# Altium PCB PCB1.PcbDoc
Units mil, origin at the board's own origin, x right, y up, seen from the top; angles counter-clockwise.
Board outline 4311 x 2991 mil, 2 copper layers (Top Layer, Bottom Layer); 115 components, 73 nets, 367 pads, 504 vias.
Unrouted connection lines stored in the file: 1.
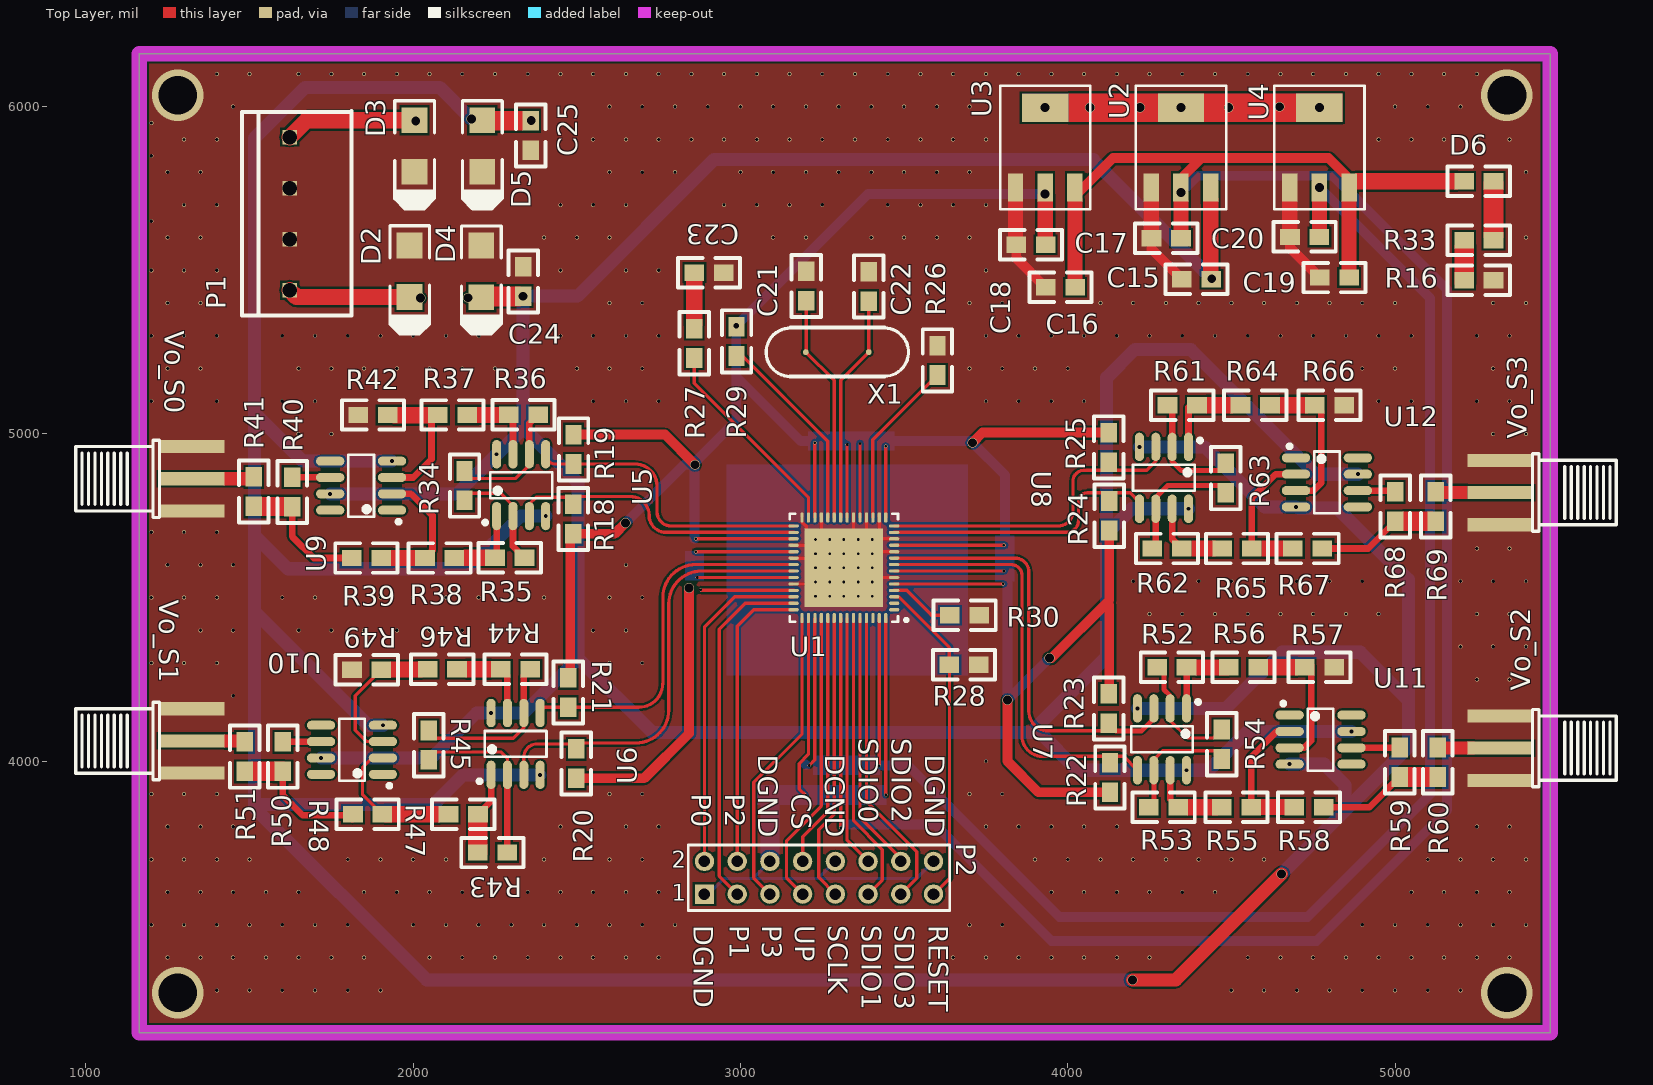
[diagram p0: Top Layer view]
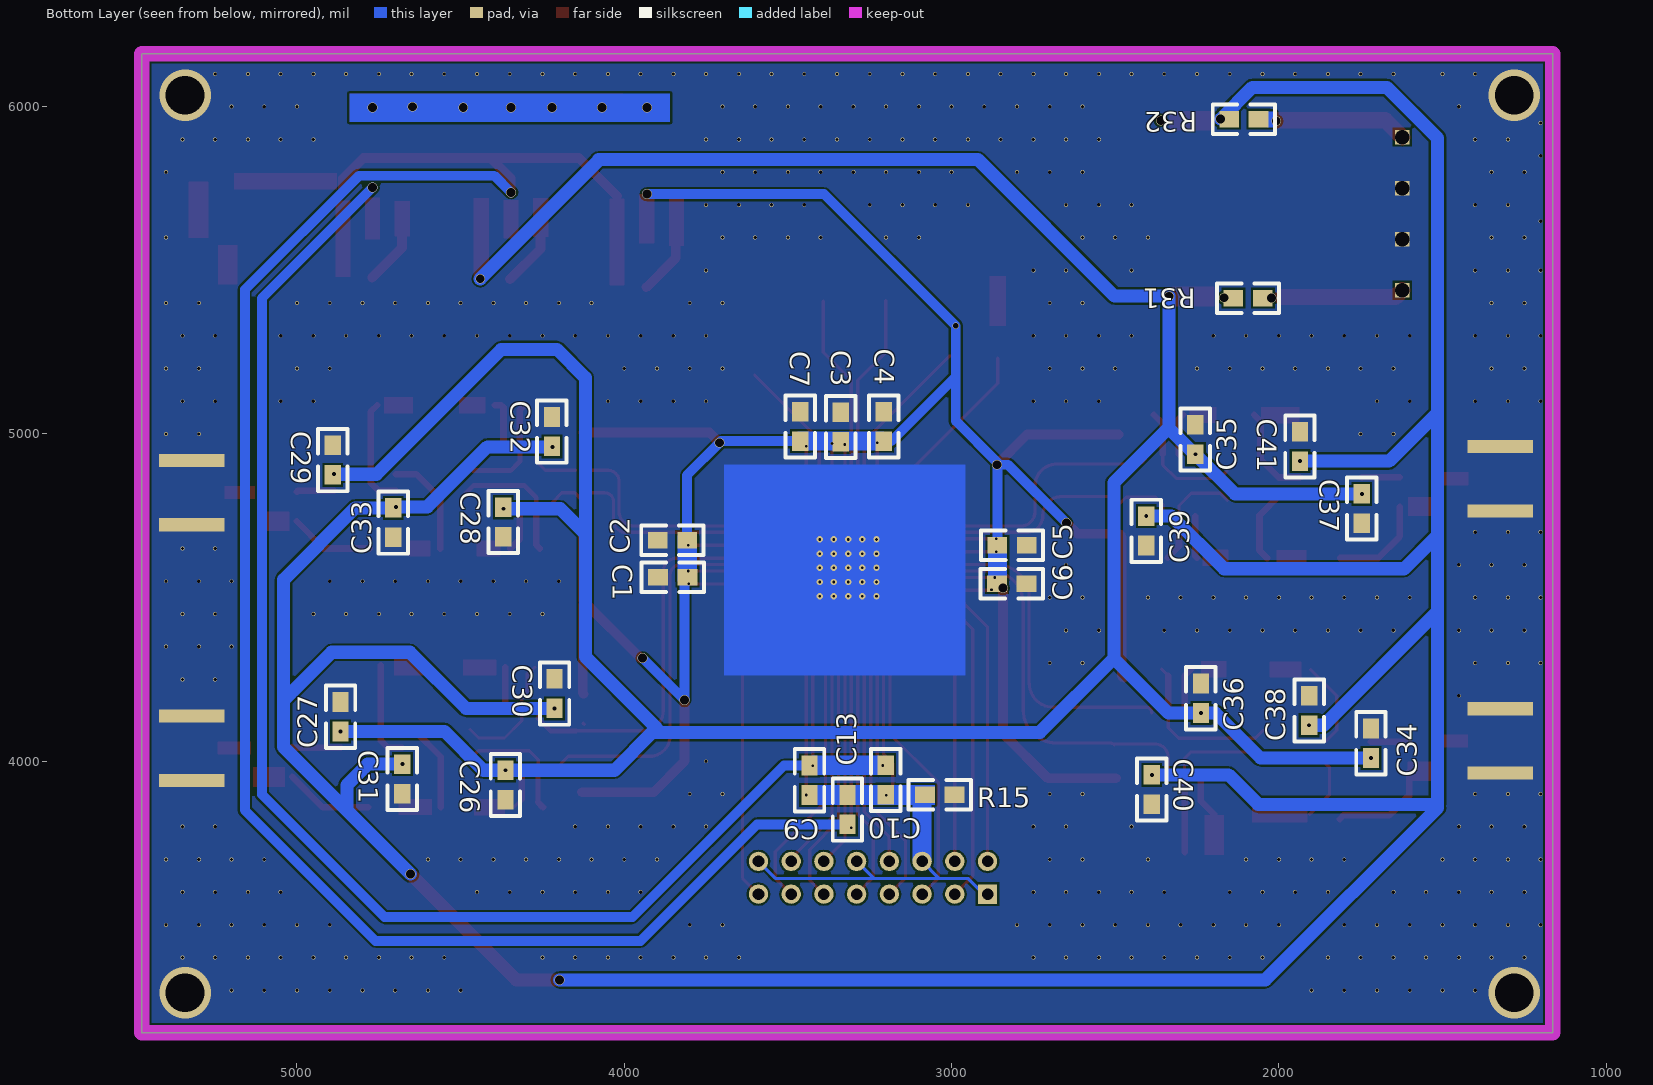
[diagram p1: Bottom Layer view, seen from below]

## Layer stack, top to bottom
Top Solder: solder mask 0.4, Solder Resist, Dk 3.5
Top Layer: signal copper 1.4
Dielectric 1: dielectric 12.6, FR-4, Dk 4.8
Bottom Layer: signal copper 1.4
Bottom Solder: solder mask 0.4, Solder Resist, Dk 3.5

## Board outline
1163,3171 5474,3171 5474,6162 1163,6162

## Design rules (kind name [scope] priority, off if disabled: settings)
Clearance [All] p1: gap=6
PlaneConnect [All] p1: planeconnectstyle=Direct reliefexpansion=20 reliefentries=4 reliefconductorwidth=10 reliefairgap=10
PolygonConnect [All] p1: connectstyle=Direct reliefconductorwidth=10 reliefentries=4 polygonreliefangle="90 Angle" airgapwidth=10
RoutingVias [All] p1: holewidth=28 width=50 viastyle="Through Hole" minholewidth=28 minwidth=50 maxholewidth=28 maxwidth=50
SolderMaskExpansion [All] p1: expansion=4
Width [All] p1: maxlimit=50 minlimit=8 preferedwidth=10
29 further rules are at their usual default settings.

## Components (designator, comment, footprint, x,y, rotation, side; value= is the part's Value field where it differs from the comment)
C1 "0.1uf" 0805 3897,4562 r180 bottom
C2 "0.1uf" 0805 3898,4675 r180 bottom
C3 "0.1uf" 0805 3339,5066 r270 bottom
C4 "0.1uf" 0805 3207,5068 r270 bottom
C5 "0.1uf" 0805 2770,4660 r0 bottom
C6 "0.1uf" 0805 2771,4542 r0 bottom
C7 "0.1uf" 0805 3462,5068 r270 bottom
C9 "0.1uf" 0805 3434,3897 r90 bottom
C10 "0.1uf" 0805 3201,3898 r90 bottom
C13 "0.1uf" 0805 3318,3897 r270 bottom
C15 "0.1uf" 0805 4348.72,5472.72 r0 top
C16 "0.1uf" 0805 3932.59,5448.1 r0 top
C17 "0.1uf" 0805 4256,5598 r0 top
C18 "0.1uf" 0805 3842.59,5578.02 r0 top
C19 "0.1uf" 0805 4770,5478 r0 top
C20 "0.1uf" 0805 4679,5602 r0 top
C21 "39pf" 0805 3201,5497 r270 top
C22 "39pf" 0805 3392,5496 r270 top
C23 "0.1uf" 0805 2859,5493 r0 top
C24 "100uF" 0805 2336,5511 r270 top
C25 "100uF" 0805 2359,5867 r90 top
C26 "0.1uf" 0805 4363,3882.51 r90 bottom
C27 "0.1uf" 0805 4867,4181 r270 bottom
C28 "0.1uf" 0805 4370,4686 r90 bottom
C29 "0.1uf" 0805 4891,4965 r270 bottom
C30 "0.1uf" 0805 4213,4251.49 r270 bottom
C31 "0.1uf" 0805 4678.02,3901 r90 bottom
C32 "0.1uf" 0805 4221,5052 r270 bottom
C33 "0.1uf" 0805 4706,4684 r90 bottom
C34 "0.1uf" 0805 1718.51,4100 r270 bottom
C35 "0.1uf" 0805 2255,5027.98 r270 bottom
C36 "0.1uf" 0805 2238,4237.49 r270 bottom
C37 "0.1uf" 0805 1746.51,4727 r90 bottom
C38 "0.1uf" 0805 1907.49,4200 r270 bottom
C39 "0.1uf" 0805 2405,4659 r90 bottom
C40 "0.1uf" 0805 2388,3868.51 r90 bottom
C41 "0.1uf" 0805 1935.49,5007 r270 bottom
D2 "P6KE6.8A" SMA/DO-214AC 1989,5576 r270 top
D3 "P6KE6.8A" SMA/DO-214AC 2004,5958.48 r270 top
D4 "5.6V" SMA/DO-214AC 2208,5575.48 r270 top
D5 "5.6V" SMA/DO-214AC 2211,5958.48 r270 top
D6 "LED" 0805 5211,5772 r0 top
P1 "VH3.96-4A 电源接入" VH3.96-4P 1477.33,5362.42 r90 top
P2 "Header 8X2" HDR2X8 2890,3594 r0 top
R15 "0" 0805 2991,3898 r0 bottom
R16 "0" 0805 5301,5470 r180 top
R18 "49.9" 0805 2489,4785 r270 top
R19 "49.9" 0805 2490,4908 r90 top
R20 "49.9" 0805 2498,4038 r270 top
R21 "49.9" 0805 2474,4165 r90 top
R22 "49.9" 0805 4129,3995 r270 top
R23 "49.9" 0805 4125,4116 r90 top
R24 "49.9" 0805 4127,4795 r270 top
R25 "49.9" 0805 4125,4914 r90 top
R26 "2K" 0805 3602,5180 r90 top
R27 "680" 0805 2859,5232 r90 top
R28 "1K" 0805 3728,4295 r180 top
R29 "1K" 0805 2988,5328 r270 top
R30 "1K" 0805 3730,4446 r180 top
R31 "600" 0805 2049,5415 r0 bottom
R32 "600" 0805 2062,5962 r0 bottom
R33 "1K" 0805 5301,5592 r180 top
R34 "200R" 0805 2157,4887 r270 top
R35 "100R" 0805 2250,4622 r0 top
R36 "100R" 0805 2382,5059 r180 top
R37 "330R" 0805 2165,5058 r180 top
R38 "330R" 0805 2126,4621 r180 top
R39 "680R" 0805 1902,4621 r180 top
R40 "10R" 0805 1630,4868 r270 top
R41 "49R9" 0805 1513,4779 r90 top
R42 "680R" 0805 1922,5058 r180 top
R43 "100R" 0805 2287,3721 r180 top
R44 "100R" 0805 2268,4281 r0 top
R45 "200R" 0805 2048,4094 r270 top
R46 "330R" 0805 2044,4281 r0 top
R47 "330R" 0805 2108,3838 r0 top
R48 "680R" 0805 1816,3838 r0 top
R49 "680R" 0805 1813,4280 r0 top
R50 "10R" 0805 1602,3969 r90 top
R51 "49R9" 0805 1485,4059 r270 top
R52 "100R" 0805 4273,4287 r0 top
R53 "100R" 0805 4338,3859 r180 top
R54 "200R" 0805 4471,4007 r90 top
R55 "330R" 0805 4561,3859 r180 top
R56 "330R" 0805 4582,4287 r180 top
R57 "680R" 0805 4814,4287 r180 top
R58 "680R" 0805 4782,3859 r180 top
R59 "10R" 0805 5014,3952 r90 top
R60 "49R9" 0805 5131,4042 r270 top
R61 "100R" 0805 4305,5088 r0 top
R62 "100R" 0805 4348,4650 r180 top
R63 "200R" 0805 4483,4820 r90 top
R64 "200R" 0805 4618,5088 r180 top
R65 "200R" 0805 4562,4650 r180 top
R66 "680R" 0805 4845,5088 r180 top
R67 "680R" 0805 4778,4650 r180 top
R68 "10R" 0805 5001,4733 r90 top
R69 "49R9" 0805 5125,4823 r270 top
U1 "ADI-AD9959-CP-56-1" ADI-CP-56-1_L 3316,4591 r180 top
U2 "AMS1117-3.3V" SOT223 4255.45,5752.9 r0 top
U3 "AMS1117-1.8V" SOT223 3840.45,5752.9 r0 top
U4 "AMS1117-1.8V" SOT223 4678.45,5752.9 r0 top
U5 "AD8008" LC-SOIC-8_150mil 2330,4843.49 r0 top
U6 "AD8008" LC-SOIC-8_150mil 2313,4053 r0 top
U7 "AD8008" LC-SOIC-8_150mil 4288,4067 r180 top
U8 "AD8008" LC-SOIC-8_150mil 4294,4866 r180 top
U9 "THS3001" LC-SOIC-8_150mil 1841,4842 r90 top
U10 "THS3001" LC-SOIC-8_150mil 1813,4035 r90 top
U11 "THS3001" LC-SOIC-8_150mil 4772.51,4066 r270 top
U12 "THS3001" LC-SOIC-8_150mil 4792,4852 r270 top
Vo_S0 "差分输出" SMA-LYING 1264,4859.06 r0 top
Vo_S1 "差分输出" SMA-LYING 1264,4058 r0 top
Vo_S2 "差分输出" SMA-LYING 5381,4044 r180 top
Vo_S3 "差分输出" SMA-LYING 5381,4825 r180 top
X1 "XTAL" "XAL HC-49S" 3392,5250 r180 top

## Footprints (in the part's own frame and the unit in brackets; to place one, negate y for a bottom-side part, rotate by r counter-clockwise, add the part's x,y. Pads: shape width x height; smd on the part's side, far side on the other; paste and mask are expansions set on the pad)
0805 [mil]
  rect 60x50 smd: 1(0,0) 2(90,0)
  silkscreen extent -50,-45 140,45
ADI-CP-56-1_L [mm] "QFN, 56-Leads, Body 8x8mm, Pitch 0.5mm, Thermal Pad 6.1x6.1mm, IPC High Density"
  oval 0.8x0.25 smd: 1(-3.9,3.25) 2(-3.9,2.75) 3(-3.9,2.25) 4(-3.9,1.75) 5(-3.9,1.25) 6(-3.9,0.75) 7(-3.9,0.25) 8(-3.9,-0.25) 9(-3.9,-0.75) 10(-3.9,-1.25) 11(-3.9,-1.75) 12(-3.9,-2.25) 13(-3.9,-2.75) 14(-3.9,-3.25) 29(3.9,-3.25) 30(3.9,-2.75) 31(3.9,-2.25) 32(3.9,-1.75) 33(3.9,-1.25) 34(3.9,-0.75) 35(3.9,-0.25) 36(3.9,0.25) 37(3.9,0.75) 38(3.9,1.25) 39(3.9,1.75) 40(3.9,2.25) 41(3.9,2.75) 42(3.9,3.25)
  oval 0.25x0.8 smd: 15(-3.25,-3.9) 16(-2.75,-3.9) 17(-2.25,-3.9) 18(-1.75,-3.9) 19(-1.25,-3.9) 20(-0.75,-3.9) 21(-0.25,-3.9) 22(0.25,-3.9) 23(0.75,-3.9) 24(1.25,-3.9) 25(1.75,-3.9) 26(2.25,-3.9) 27(2.75,-3.9) 28(3.25,-3.9) 43(3.25,3.9) 44(2.75,3.9) 45(2.25,3.9) 46(1.75,3.9) 47(1.25,3.9) 48(0.75,3.9) 49(0.25,3.9) 50(-0.25,3.9) 51(-0.75,3.9) 52(-1.25,3.9) 53(-1.75,3.9) 54(-2.25,3.9) 55(-2.75,3.9) 56(-3.25,3.9)
  rect 6.1x6.1 smd: 57(0,0)
  silkscreen extent -4.98,-4.2 4.2,4.2, body extent -4.05,-4.05 4.05,4.05, height 1
HDR2X8 [mm] "Connector; Header; 8x2 Position"
  rect 1.5x1.5 hole 0.9: 1(0,0)
  round 1.5 hole 0.9: 2(0,2.54) 3(2.54,0) 4(2.54,2.54) 5(5.08,0) 6(5.08,2.54) 7(7.62,0) 8(7.62,2.54) 9(10.16,0) 10(10.16,2.54) 11(12.7,0) 12(12.7,2.54) 13(15.24,0) 14(15.24,2.54) 15(17.78,0) 16(17.78,2.54)
  silkscreen extent -1.27,-1.27 19.05,3.81
LC-SOIC-8_150mil [mm]
  oval 0.7x2.2 smd: 1(-1.905,-2.4) 2(-0.635,-2.4) 3(0.635,-2.4) 4(1.905,-2.4) 5(1.905,2.4) 6(0.635,2.4) 7(-0.635,2.4) 8(-1.905,2.4)
  silkscreen extent -2.95,-3.05 2.4,1
SMA-LYING [mm]
  rect 5.08x1.016 smd: 0(1.5,0.1) 1(1.5,-2.4) 1(1.5,2.6)
  rect 5.08x1.016 smd far side: 1(1.5,-2.4) 1(1.5,2.6)
  silkscreen extent -7.5,-2.9 -1,3.1
SMA/DO-214AC [mm]
  rect 2x2 smd: 1(0,0) 2(4,0)
  silkscreen extent -1.52,-1.52 6.86,1.55
SOT223 [mm]
  rect 1.2x2.2 smd: 1(0,0) 2(2.3,0) 3(4.6,0)
  rect 3.6x2.2 smd: 4(2.3,6.2)
  silkscreen extent -1.2,-1.7 5.8,7.9
VH3.96-4P [mm]
  rect 1.14x1.14 hole 1.14: 1(1.95,-3.7) 2(5.91,-3.7) 3(9.87,-3.7) 4(13.83,-3.7)
  silkscreen extent 0,-8.5 15.87,0
"XAL HC-49S" [mm]
  round 0.45 smd: 1(4.88,0) 2(0,0)
  silkscreen extent -3.08,-1.9 7.96,1.9

## Part data
C1 C2 C3 C4 C5 C6 C7 C9 C10 C13 C15 C16 C17 C18 C19 C20 C21 C22 C23 C26 C27 C28 C29 C30 C31 C32 C33 C34 C35 C36 C37 C38 C39 C40 C41: library part Cap
C24 C25: library part CAP
D4 D5: library part 肖特基-5.6V
P1: library part VH3.96-4A
P2: "Header, 8-Pin, Dual row"
R15 R16 R18 R19 R20 R21 R22 R23 R24 R25 R26 R27 R28 R29 R30 R31 R32 R33 R34 R35 R36 R37 R38 R39 R40 R41 R42 R43 R44 R45 R46 R47 R48 R49 R50 R51 R52 R53 R54 R55 R56 R57 R58 R59 R60 R61 R62 R63 R64 R65 R66 R67 R68 R69: library part Res
Vo_S0 Vo_S1 Vo_S2 Vo_S3: library part SMA
X1: "Crystal Oscillator"

## Via types
v1: diameter 12, hole 10, Top Layer to Bottom Layer, 417 vias
v2: diameter 30, hole 27, Top Layer to Bottom Layer, 25 vias
v3: diameter 19.68, hole 7.87, Top Layer to Bottom Layer, 25 vias
v4: diameter 10, hole 8, Top Layer to Bottom Layer, 16 vias
v5: diameter 15, hole 12, Top Layer to Bottom Layer, 16 vias
v6: diameter 157.48, hole 118.11, Top Layer to Bottom Layer, 4 vias
v7: diameter 20, hole 17, Top Layer to Bottom Layer, 1 vias

## Nets (pads, with @x,y where several pads share a name; then routed paths per layer and width w, separated by ;. In a path a pad name is that pad's centre, name@x,y a point inside that pad or via, vN(x,y) a via of type N, cw(c..) or ccw(c..) an arc to the next point about the centre after c; other vN are vias at no path point)
1.8VA: C1.2 C2.2 C3.2 C4.2 C5.2 C6.2 C7.2 C18.2 R18.2 R19.2 R20.2 R21.2 R22.2 R23.2 R24.2 R25.2 R29.1 U1.5 U1.7 U1.11 U1.15 U1.19 U1.21 U1.26 U1.31 U1.33 U1.37 U1.39 U3.2 | length 10215
  Top Layer w10: v4(2863,4640.21) U1.33 ; v4(2863.42,4679.58) U1.31 ; v4(2867.47,4561.47) U1.37 ; v4(2877.95,4523.62) 2879.47,4522.1 U1.39 ; U1.26 v4(3227.42,4973.42) ; U1.21 v4(3325.84,4967.84) ; U1.19 v4(3365.21,4970.79) ; U1.15 v4(3443.95,4962.05) ; U1.5 v4(3803.21,4541.79) ; U1.7 v4(3804.84,4581.16) ; U1.11 v4(3805,4659.9) v4@3806.9,4659.9
  Top Layer w30: R21.2 2480,4261 2480,4686 R18.2 2616,4695 v2(2649,4728) ; R19.2 2769,4998 v2(2861,4906) ; R20.2 2706,3948 2843,4085 v2(2843,4529) ; v2(3709,4973) 3740,5004 R25.2 ; v2(3816,4187) 3816,4000 3911,3905 R22.2 ; v2(3944,4315) 3950,4315 4127,4492 R24.2 ; R23.2 4127,4208 4127,4478
  Bottom Layer w30: v2(2649,4728) 2827,4906 v2@2860,4906 ; C5.2@2860,4679.58 v2@2860,4906 ; v2(2861,4906) v2@2860,4906 ; C4.2 3184,4978 2987,5175 ; C7.2 3704,4978 v2(3709,4973) 3808,4874 C2.2 ; C1.2 3816,4553 v2(3816,4187) v2(3944,4315) ; v2(3931,5733) 3390,5733 v7(2987,5330) 2987,5175 ; v2@2860,4906 2860,4912 2987,5039 2987,5175
1.8VD: C9.2 C10.2 C20.2 U1.45 U1.55 U4.2 | length 4935.5
  Top Layer w10: v4(3210,3987) 3227.42,4004.42 U1.45 ; v4(3424.27,3986.73) U1.55
  Bottom Layer w30: C10.2@3199,3990 C10.2 ; v4(3424.27,3986.73) 3512.27,3986.73 3975,3524 4733,3524 5107,3898 5107,5414.91 v2(4769,5752.91)
3.3VD: C13.2 C16.2 C17.2 C19.2 D6.1 U1.49 U2.2 U3.3 U4.3 | length 6433.4
  Top Layer w10: v4(3306.16,3797.16) U1.49
  Top Layer w30: U3.3@4022,5727 4138,5843 4409,5843 ; v2(4346,5738) 4348,5740 4348,5782 4409,5843 ; U4.3 4859.55,5780.45 4797,5843 4409,5843
  Bottom Layer w30: C13.2 3594,3807 3950,3451 4760,3451 5159,3850 5159,5441 4811,5789 4397,5789 v2(4346,5738)
+5VA: C15.2 C24.2 C26.2 C27.2 C28.2 C29.2 C34.2 C35.2 C36.2 C37.2 D4.2 R31.2 U2.3 U5.8 U6.8 U7.8 U8.8 U9.7 U10.7 U11.7 U12.7 | length 10164.3
  Bottom Layer w40: v5(1718.51,4010) 2056,4010 2193.49,4147.49 v5(2238,4147.49) 2337.49,4147.49 2504,4314 ; v5(1746.51,4817) 2134.02,4817 v5(2255,4937.98) 2256.77,4937.98 2336,5017.21 2336,5019 ; 4079,5835 v2(4440,5474) ; 4079,5838 2919,5838 2502,5421 v2(2336,5421) 2336,5019 ; v5(4369,4771.51) 4195.51,4771.51 4119,4695 ; v5(4867,4091) 4549,4091 4430.51,3972.51 v5(4363,3972.51) 4029.49,3972.51 3914,4088 ; v5(4886.49,4877) 4757,4877 4376,5258 4205,5258 4119,5172 4119,4695 ; 2336,5019 2504,4851 2504,4314 ; 2504,4314 2730,4088 3914,4088 ; 3914,4088 3901,4101 4119,4319 4119,4695
  other v2: 2168,5416
-5VA: C25.2 C30.2 C31.2 C32.2 C33.2 C38.2 C39.2 C40.2 C41.2 D5.1 R32.2 U5.4 U6.4 U7.4 U8.4 U9.4 U10.4 U11.4 U12.4 | length 12495.7
  Top Layer w40: v2(4198,3332) 4330,3332 v2(4653,3655)
  Bottom Layer w40: 1515,3858 2041,3332 v2(4198,3332) ; v5(1907.49,4110) 1863,4110 1515,4458 ; v5(1935.49,4917) 1663,4917 1515,5065 ; v2(2178,5962) 2081,6059 1670,6059 1515,5904 1515,5065 ; v5(2388,3958.51) 2153.51,3958.51 2063.11,3868.11 1515,3868.11 1515,4458 ; v5(2405,4749) 2328,4749 2167,4588 1617,4588 1515,4690 ; v5(4213,4161.49) 4483.49,4161.49 4655,4333 4894,4333 5041,4186 ; v5(4219,4960.49) 4418.51,4960.49 4602,4777 v5(4697.51,4777) ; v2(4653,3655) 4847,3849 ; v5(4678.02,3991) 4784,3991 4847,3928 4847,3849 ; C33.2 4822,4774 5041,4555 5041,4186 ; 1515,4458 1515,4690 ; 1515,4690 1515,5065 ; 4847,3849 5041,4043 5041,4186
  other v2: 2361,5958
AGND: C1.1 C2.1 C3.1 C4.1 C5.1 C6.1 C7.1 C15.1 C16.1 C17.1 C18.1 C19.1 C20.1 C21.1 C22.1 C23.2 C24.1 C25.1 C26.1 C27.1 C28.1 C29.1 C30.1 C31.1 C32.1 C33.1 C34.1 C35.1 C36.1 C37.1 C38.1 C39.1 C40.1 C41.1 D2.1 D3.2 D4.1 D5.2 P1.2 P1.3 R15.1 R16.1 R26.2 R28.1 R30.1 R42.2 R49.1 R57.1 R66.1 U1.6 U1.10 U1.12 U1.16 U1.18 U1.20 U1.25 U1.28 U1.32 U1.34 U1.38 U1.57 U2.1 U3.1 U4.1 Vo_S0.1 Vo_S1.1 Vo_S2.1 Vo_S3.1 | length 1900.6
  Top Layer w10: U1.38 3266.79,4541.79 v3(3272.69,4547.69) v3(3316,4591) ; U1.34 U1.57@3286.47,4620.53 ; U1.32 U1.57@3247.1,4659.9 ; U1.28 3188.05,4730.89 3201.14,4717.8 3201.14,4705.86 U1.57@3247.1,4659.9 ; U1.25 U1.57@3247.1,4659.9 ; U1.20 U1.57@3345.53,4620.53 ; U1.18 U1.57@3384.9,4659.9 ; U1.16 3424.27,4680.31 U1.57@3425,4679.58 ; U1.6 3345.53,4561.47 v3(3316,4591) ; U1.10 U1.57@3365.21,4640.21 ; U1.12 U1.57@3425,4679.58 ; U1.57@3247.1,4659.9 U1.57@3286.47,4620.53 ; U1.57@3286.47,4620.53 v3(3316,4591) ; v3(3316,4591) U1.57@3345.53,4620.53 ; U1.57@3345.53,4620.53 v3(3359.31,4634.31) U1.57@3365.21,4640.21 ; U1.57@3365.21,4640.21 U1.57@3384.9,4659.9 ; U1.57@3384.9,4659.9 v3(3402.61,4677.61) 3404.58,4679.58 U1.57@3425,4679.58
  Top Layer w30: C18.1 3842.59,5538.1 C16.1 ; C17.1 4256,5565.44 C15.1 ; C20.1 4679,5569 C19.1
  other v1: 1400,3300 1500,3300 1600,3300 1700,3300 1800,3300 1900,3300 4500,3300 4600,3300 4700,3300 4800,3300 4900,3300 5000,3300 5100,3300 5200,3300 1250,3400 1350,3400 1450,3400 1550,3400 1650,3400 1750,3400 1850,3400 2050,3400 2150,3400 2250,3400 2350,3400 2450,3400 2550,3400 2650,3400 2750,3400 3650,3400 3750,3400 3850,3400 3950,3400 4050,3400 4150,3400 4250,3400 4550,3400 4650,3400 4750,3400 4850,3400 4950,3400 5050,3400 5150,3400 5250,3400 5350,3400 1200,3500 1300,3500 1400,3500 1500,3500 1600,3500 1700,3500 1800,3500 2000,3500 2100,3500 2200,3500 2300,3500 2400,3500 2500,3500 2600,3500 2700,3500 2800,3500 3700,3500 3800,3500 4900,3500 5000,3500 5100,3500 5200,3500 5300,3500 5400,3500 1250,3600 1350,3600 1450,3600 1550,3600 1650,3600 1850,3600 1950,3600 2050,3600 2150,3600 2350,3600 2450,3600 2550,3600 2650,3600 2750,3600 3950,3600 4050,3600 4150,3600 4250,3600 4350,3600 4450,3600 5050,3600 5150,3600 5250,3600 5350,3600 1200,3700 1300,3700 1400,3700 1500,3700 1800,3700 1900,3700 2000,3700 2100,3700 2400,3700 2600,3700 2700,3700 3900,3700 4000,3700 4100,3700 4200,3700 4300,3700 4400,3700 4500,3700 4600,3700 5100,3700 5200,3700 5300,3700 5400,3700 1250,3800 1350,3800 1450,3800 2450,3800 2650,3800 2750,3800 3750,3800 3850,3800 3950,3800 4050,3800 4150,3800 5250,3800 5350,3800 1200,3900 1300,3900 1400,3900 2600,3900 2700,3900 3700,3900 3800,3900 3750,4000 1450,4200 5250,4250 5350,4250 1200,4300 1300,4300 1400,4300 2600,4300 2700,4300 5200,4350 5300,4350 5400,4350 1250,4400 1350,4400 1450,4400 1650,4400 1750,4400 1850,4400 1950,4400 2050,4400 2150,4400 2250,4400 2350,4400 2550,4400 2650,4400 4250,4450 4350,4450 4450,4450 4550,4450 4650,4450 4750,4450 4850,4450 4950,4450 5250,4450 5350,4450 1200,4500 1300,4500 1400,4500 1600,4500 1700,4500 1800,4500 1900,4500 2000,4500 2100,4500 2200,4500 2300,4500 2400,4500 2600,4500 2700,4500 4200,4550 4300,4550 4400,4550 4500,4550 4600,4550 4700,4550 4800,4550 4900,4550 5200,4550 5300,4550 5400,4550 1250,4600 1350,4600 1450,4600 2650,4600 5250,4650 5350,4650 1200,4700 1300,4700 1400,4700 1650,5000 1750,5000 5300,5000 5400,5000 1200,5100 1300,5100 1400,5100 1600,5100 1700,5100 2550,5100 2650,5100 2750,5100 3750,5100 3850,5100 3950,5100 4050,5100 4950,5100 5050,5100 5250,5100 5350,5100 1250,5200 1350,5200 1650,5200 1750,5200 1850,5200 1950,5200 2050,5200 2150,5200 2250,5200 2500,5200 2600,5200 2700,5200 3700,5200 3800,5200 3900,5200 4000,5200 4900,5200 5000,5200 5300,5200 5400,5200 1200,5300 1300,5300 1400,5300 1600,5300 1700,5300 1800,5300 1900,5300 2000,5300 2100,5300 2200,5300 2450,5300 2550,5300 2650,5300 2750,5300 3750,5300 3850,5300 3950,5300 4050,5300 4150,5300 4250,5300 4350,5300 4450,5300 4550,5300 4650,5300 4750,5300 4850,5300 4950,5300 5050,5300 5250,5300 5350,5300 1250,5400 1350,5400 2600,5400 2700,5400 3700,5400 3800,5400 4100,5400 4200,5400 4300,5400 4400,5400 4500,5400 4600,5400 4700,5400 4800,5400 4900,5400 5000,5400 5300,5400 5400,5400 1200,5500 1300,5500 1400,5500 2450,5500 2650,5500 2750,5500 3750,5500 1250,5600 1350,5600 2400,5600 2500,5600 2600,5600 3100,5600 3200,5600 3400,5600 3500,5600 3600,5600 3700,5600 5400,5600 1200,5650 1300,5700 1400,5700 2450,5700 2550,5700 2650,5700 2950,5700 3050,5700 3150,5700 3250,5700 3450,5700 3550,5700 3650,5700 3750,5700 1250,5800 1350,5800 2600,5800 2700,5800 2800,5800 3000,5800 3100,5800 3200,5800 3300,5800 3400,5800 3500,5800 3600,5800 3700,5800 5400,5800 1200,5850 1300,5900 1400,5900 2550,5900 2650,5900 2750,5900 2850,5900 2950,5900 3050,5900 3150,5900 3250,5900 3350,5900 3450,5900 3550,5900 3650,5900 3750,5900 4950,5900 5050,5900 5150,5900 5250,5900 5350,5900 1200,5950 1450,6000 2600,6000 2700,6000 2800,6000 2900,6000 3000,6000 3100,6000 3200,6000 3300,6000 3400,6000 3500,6000 3600,6000 3700,6000 5000,6000 5100,6000 5200,6000 1400,6100 1500,6100 1650,6100 1750,6100 1850,6100 1950,6100 2050,6100 2150,6100 2250,6100 2350,6100 2450,6100 2550,6100 2650,6100 2750,6100 2850,6100 2950,6100 3050,6100 3150,6100 3250,6100 3350,6100 3450,6100 3550,6100 3650,6100 3750,6100 3850,6100 3950,6100 4050,6100 4150,6100 4250,6100 4350,6100 4450,6100 4550,6100 4650,6100 4750,6100 4850,6100 4950,6100 5050,6100 5150,6100 5250,6100
  other v3: 3229.39,4504.39 3272.69,4504.39 3316,4504.39 3359.31,4504.39 3402.61,4504.39 3229.39,4547.69 3316,4547.69 3359.31,4547.69 3402.61,4547.69 3229.39,4591 3272.69,4591 3359.31,4591 3402.61,4591 3229.39,4634.31 3272.69,4634.31 3316,4634.31 3402.61,4634.31 3229.39,4677.61 3272.69,4677.61 3316,4677.61 3359.31,4677.61
  other v6: 1281,3293 5342,3293 1281,6035 5342,6035
"CH0 IOUT": R18.1 U1.30 U5.3 | length 906.9
  Top Layer w10: U5.3 2355,4786 2376,4807 2467,4807 R18.1 ; R18.1@2507,4809 2663,4809 cw(c2663,4751) 2721,4751 ccw(c2772.73,4751) 2772.73,4699.27 U1.30
"CH0 IOUTN": R19.1 U1.29 U5.5 | length 916.4
  Top Layer w10: U5.5 ccw(c2434.98,4937.98) 2434.98,4908 R19.1 2678,4908 cw(c2678,4841) 2745,4841 2745,4762 ccw(c2788.05,4762) 2788.05,4718.95 U1.29
"CH1 IOUT": R20.1 U1.36 U6.3 | length 1343.4
  Top Layer w10: U6.3 2338,4012 cw(c2379,4012) 2379,4053 2501,4053 cw(c2501,4050.73) 2503.27,4050.73 cw(c2516,4038) 2516,4056 2681,4056 ccw(c2681,4156) 2781,4156 2781,4481.16 cw(c2881,4481.16) 2881,4581.16 U1.36
"CH1 IOUTN": R21.1 U1.35 U6.5 | length 1145.7
  Top Layer w10: U6.5 cw(c2405.51,4147.49) 2405.51,4165 R21.1 2690.18,4165 ccw(c2690.18,4237.03) 2762.21,4237.03 ; 2763,4237.03 2763,4500.84 cw(c2863,4500.84) 2863,4600.84 U1.35
"CH2 IOUT": R22.1 U1.8 U7.5 | length 1305.8
  Top Layer w10: U1.8 3827.16,4600.84 cw(c3827.16,4568) 3860,4568 3860,4078 ccw(c3923,4078) 3923,4015 4170.51,4015 U7.5
"CH2 IOUTN": R23.1 U1.9 U7.3 | length 1328.9
  Top Layer w10: U1.9 3839.47,4620.53 cw(c3839.47,4579) 3881,4579 3881,4153 ccw(c3941,4153) 3941,4093 R23.1@4148,4093 ; R23.1@4122,4113 ccw(c4122,4116) R23.1 ; U7.3@4263,4130 U7.3
  Top Layer w15: R23.1@4148,4093 4226,4093 U7.3@4263,4130
"CH3 IOUT": R24.1 U1.13 U8.5 | length 900
  Top Layer w10: U1.13 3996.27,4699.27 ccw(c3996.27,4736) 4033,4736 4033,4794 cw(c4059,4794) 4059,4820 4102,4820 cw(c4102,4795) R24.1 4152,4820 4191,4820 4219,4792 U8.5
"CH3 IOUTN": R25.1 U1.14 U8.3 | length 980.9
  Top Layer w10: U1.14 3970.95,4718.95 ccw(c3970.95,4764) 4016,4764 4016,4856 cw(c4049,4856) 4049,4889 4100,4889 ccw(c4100,4914) R25.1 ; 4150,4889 4242,4889 4269,4916 U8.3
CLKSEL: R29.2 U1.24 | length 620.1
  Top Layer w10: R29.2 3007,5238 3266.79,4978.21 U1.24
CS: P2.8 U1.47 | length 775.3
  Top Layer w10: P2.8 3190,3769 3266.79,3845.79 U1.47
DGND: C9.1 C10.1 C13.1 P2.1 P2.6 P2.10 P2.16 R15.2 R16.2 R33.2 U1.44 U1.56 | length 1989
  Top Layer w10: v4(3199,3896) 3180,3915 3180,3993 3207.73,4020.73 U1.44 ; v4(3443.95,3896.95) U1.56
  Bottom Layer w10: P2.1 2902,3594 2950,3642 3040,3642 ; P2.6 3040,3644 3040,3642 ; P2.10 3238,3642 ; P2.16 3538,3642 3238,3642 ; 3040,3642 3238,3642
NetC23_1: C23.1 R27.2
NetD6_2: D6.2 R33.1
NetR26_1: R26.1 U1.17 | length 517.2
  Top Layer w10: U1.17 3404.58,4982.58 R26.1
NetR27_1: R27.1 U1.27 | length 631.9
  Top Layer w10: R27.1 2859,5155 3207.73,4806.27 U1.27
NetR30_2: R30.2 U1.4 | length 202.1
  Top Layer w10: U1.4 3507.9,4522.1 3583,4447 ccw(c3584,4447) 3584,4446 R30.2
NetR34_1: R34.1 R36.1 U5.6 | length 389.7
  Top Layer w10: R34.1 2180,4864 2314,4864 2355,4905 U5.6
  Top Layer w20: U5.6 2355,5032 R36.1
NetR34_2: R34.2 R35.2 U5.2 | length 346.4
  Top Layer w10: R34.2 2179,4819 2267,4819 2305,4781 U5.2
  Top Layer w20: U5.2 2305,4657 R35.2
NetR35_1: R35.1 R38.1 U5.1 | length 129.1
  Top Layer w20: R35.1 2255,4627 U5.1
NetR36_2: R36.2 R37.1 U5.7 | length 126.4
  Top Layer w20: R36.2 2305,5046 U5.7
NetR37_2: R37.2 R42.1 U9.3 | length 286.6
  Top Layer w20: U9.3 2000,4867 2056,4923 2056,5039 R37.2
NetR38_2: R38.2 R39.1 U9.2 | length 290.4
  Top Layer w20: U9.2 1993,4817 2059,4751 2059,4644 R38.2
NetR39_2: R39.2 R40.2 R41.1 | length 300.3
  Top Layer w20: R40.2 1630,4687 1696,4621 R39.2
NetR40_1: R40.1 U9.6 | length 116.9
  Top Layer w20: R40.1 1745.51,4868 U9.6
NetR41_2: R41.2 Vo_S0.0
NetR43_1: R43.1 R45.2 U6.2 | length 546.2
  Top Layer w10: R45.2 2072,4028 2269,4028 2288,4009 U6.2 ; R43.1 R43.1@2288,3722
  Top Layer w20: R43.1@2288,3722 U6.2
NetR43_2: R43.2 R47.2 U6.1 | length 137.1
  Top Layer w20: R47.2 2238,3878 U6.1
NetR44_1: R44.1 R46.2 U6.7 | length 141.8
  Top Layer w20: R44.1 2288,4261 U6.7
NetR44_2: R44.2 R45.1 U6.6 | length 500.5
  Top Layer w10: R45.1 2072,4070 2306,4070 2338,4102 U6.6 ; R44.2@2338,4261 R44.2
  Top Layer w20: U6.6 R44.2@2338,4261
NetR46_1: R46.1 R49.2 U10.3 | length 317.1
  Top Layer w10: R49.2 1823,4200 1823,4095 1858,4060 U10.3
NetR47_1: R47.1 R48.2 U10.2 | length 242.2
  Top Layer w10: R48.2 1845,3899 1845,3980 1875,4010 U10.2
NetR48_1: R48.1 R50.1 R51.2 | length 315.8
  Top Layer w20: R50.1 1602,3895 1662,3835 1802,3835 R48.1@1814,3823
NetR50_2: R50.2 U10.6 | length 116.9
  Top Layer w10: R50.2 R50.2@1603,4060
  Top Layer w20: R50.2@1603,4060 U10.6
NetR51_1: R51.1 Vo_S1.0
NetR52_1: R52.1 R54.2 U7.2 | length 370.3
  Top Layer w10: R52.1 R52.1@4294,4266 ; U7.2@4313,4200 U7.2 4313,4124 4366,4071 4445,4071 R54.2
  Top Layer w15: R52.1@4294,4266 4294,4219 U7.2@4313,4200
NetR52_2: R52.2 R56.2 U7.1 | length 125.5
  Top Layer w20: U7.1 R52.2
NetR53_1: R53.1 R55.2 U7.7 | length 123.9
  Top Layer w10: 4313,3884 R53.1
  Top Layer w20: 4313,3884 U7.7
NetR53_2: R53.2 R54.1 U7.6 | length 381.8
  Top Layer w10: U7.6 4263,4005 4290,4032 4446,4032 R54.1
  Top Layer w15: R53.2@4263,3874 U7.6
  Top Layer w20: R53.2 R53.2@4263,3874
NetR55_1: R55.1 R58.2 U11.2 | length 303.9
  Top Layer w20: R55.1 4561,4014 4638,4091 U11.2
NetR56_1: R56.1 R57.2 U11.3 | length 305.1
  Top Layer w20: U11.3 4722,4041 4744,4063 R57.2@4744,4293
NetR58_1: R58.1 R59.1 R60.2 | length 270.5
  Top Layer w20: R58.1 4921,3859 R59.1
NetR59_2: R59.2 U11.6 | length 147.4
  Top Layer w20: U11.6 5013,4041 R59.2
NetR60_1: R60.1 Vo_S2.0
NetR61_1: R61.1 R63.2 U8.2 | length 362.5
  Top Layer w10: R63.2@4461,4888 R63.2
  Top Layer w15: U8.2 4319,4916 4347,4888 R63.2@4461,4888
  Top Layer w20: R61.1 4319,5074 U8.2
NetR61_2: R61.2 R64.2 U8.1 | length 149.4
  Top Layer w20: U8.1 4369,5081 4376,5088 R61.2
NetR62_1: R62.1 R65.2 U8.7 | length 133.5
  Top Layer w20: U8.7 4319,4679 R62.1
NetR62_2: R62.2 R63.1 U8.6 | length 398.6
  Top Layer w15: U8.6 4269,4806 4305,4842 4461,4842 R63.1
  Top Layer w20: R62.2 4269,4661 U8.6
NetR64_1: R64.1 R66.2 U12.3 | length 332.7
  Top Layer w20: U12.3 4751,4827 4775,4851 4775,5068 R66.2
NetR65_1: R65.1 R67.2 U12.2 | length 319.7
  Top Layer w20: R65.1 4562,4804 4635,4877 U12.2
NetR67_1: R67.1 R68.1 R69.2 | length 257.4
  Top Layer w20: R67.1 4918,4650 R68.1
NetR68_2: R68.2 U12.6 | length 116.2
  Top Layer w20: U12.6 4997,4827 R68.2
NetR69_1: R69.1 Vo_S3.0
P0: P2.2 U1.40 | length 1026.7
  Top Layer w10: P2.2 2890,4410 2982.42,4502.42 U1.40
P1: P2.3 U1.41 | length 1092.3
  Top Layer w10: P2.3 2935,3649 2935,4403 3014.73,4482.73 U1.41
P2: P2.4 U1.42 | length 912.2
  Top Layer w10: P2.4 2990,4413 3040.05,4463.05 U1.42
P3: P2.5 U1.43 | length 924.7
  Top Layer w10: P2.5 3041,3643 3041,3936 3188.05,4083.05 U1.43
REFCLK: C21.2 U1.23 X1.1 | length 698.8
  Top Layer w10: C21.2 3201,5251.13 X1.1 3286.47,5163.4 U1.23
REFCLKN: C22.2 U1.22 X1.2 | length 697
  Top Layer w10: U1.22 3306.16,5164.16 X1.2 C22.2
RESET: P2.15 R28.2 U1.3 | length 1006.9
  Top Layer w10: U1.3 3483.2,4502.42 3638,4347.62 R28.2 3639,4294 3639,3643 P2.15
SCLK: P2.9 U1.48 | length 884.2
  Top Layer w10: U1.48 3286.47,3838.47 3239,3791 3239,3645 P2.9
SDIO0: P2.12 U1.50 | length 770
  Top Layer w10: U1.50 3325.84,3758.16 P2.12
SDIO1: P2.11 U1.51 | length 897.5
  Top Layer w10: U1.51 3345.53,3817.47 3433,3730 3433,3637 P2.11
SDIO2: P2.14 U1.52 | length 795.1
  Top Layer w10: U1.52 3365.21,3828.79 3490,3704 P2.14
SDIO3: P2.13 U1.53 | length 927.6
  Top Layer w10: U1.53 3384.9,3878.1 3539,3724 3539,3643 P2.13
UP: P2.7 U1.46 | length 907.7
  Top Layer w10: P2.7 3141,3643 3141,3757 3247.1,3863.1 U1.46
V+: D2.2 P1.1 R31.1 | length 374.6
  Top Layer w50: P1.1 1643.67,5418.52 D2.2
  other v2: 2022,5415
V-: D3.1 P1.4 R32.1 | length 402.4
  Top Layer w50: P1.4 1674.57,5958.48 D3.1
  other v2: 2008,5956
pads on no net: U1.1 U1.2 U1.54 U2.4 U3.4 U4.4 U9.1 U9.5 U9.8 U10.1 U10.5 U10.8 U11.1 U11.5 U11.8 U12.1 U12.5 U12.8
copper on no net:
  other v2: 3931,5997 4068,5997 4221,5997 4346,5997 4492,5997 4769,5997 4647,6000

## Polygon pours and split planes (outlines as drawn)
AGND on Bottom Layer "Top Layer-No Net" (solid, pour order 16): 1163,6162 1163,3171 5474,3171 5474,6162
AGND on Top Layer "Top Layer-No Net" (solid, pour order 18): 1163,3171 5474,3171 5474,6150 5462,6162 1163,6162

## Keep-outs
Keep-Out Layer:
  the board outline again, w47.24

## Other copper
Top Layer:
  rectangle net NetR47_1: 1912,3813 2082,3863
  rectangle net NetR46_1: 1931,4256 2028,4304
  rectangle net NetR48_1: 1505,3940 1607,3999
  rectangle net NetR51_1: 1422,4042 1504,4082
  rectangle net NetR43_2: 2168,3713 2227,3835
  rectangle net NetR44_1: 2160,4256 2238,4306
  rectangle net 3.3VD: 4878,5747 5192,5797
  rectangle net NetC23_1: 2834,5330 2884,5483
  rectangle net DGND: 5181,5457 5241,5578
  rectangle net NetD6_2: 5271,5598 5331,5772
  region net 3.3VD: 4883,5480 4883,5714 4836,5714 4836,5480
  region net 1.8VD: 4792,5594 4792,5723 4746,5723 4746,5594
  region net AGND: 4702,5603 4702,5712 4655,5712 4655,5603
  region net +5VA: 4460,5473 4460,5721 4414,5721 4414,5473
  region net AGND: 4279,5602 4279,5721 4232,5721 4232,5602
  region net 3.3VD: 4369,5597 4369,5715 4323,5715 4323,5597
  region net AGND: 3864,5575 3864,5726 3818,5726 3818,5575
  region net 3.3VD: 4045,5453 4045,5719 3999,5719 3999,5453
  region net 1.8VA: 3955,5582 3955,5733 3908,5733 3908,5582
  rectangle net +5VA: 2196,5390 2328,5451
  rectangle net -5VA: 2204,5927 2335,5987
  rectangle net NetR35_1: 2154,4597 2233,4647
  rectangle net NetR38_2: 1915,4597 2007,4645
  rectangle net NetR37_2: 1937,5032 2054,5083
  rectangle net NetR36_2: 2191,5034 2273,5083
  rectangle net NetR39_2: 1520,4749 1605,4808
  rectangle net NetR41_2: 1421,4843 1523,4883
  rectangle net NetR52_2: 4391,4262 4493,4311
  rectangle net NetR56_1: 4610,4262 4703,4312
  rectangle net NetR53_1: 4364,3834 4459,3884
  rectangle net NetR55_1: 4588,3835 4690,3884
  rectangle net NetR58_1: 5036,3922 5135,3982
  rectangle net NetR60_1: 5141,4020 5243,4060
  rectangle net NetR62_1: 4378,4625 4452,4675
  rectangle net NetR65_1: 4592,4625 4660,4675
  rectangle net NetR61_2: 4424,5063 4505,5113
  rectangle net NetR64_1: 4646,5063 4734,5113
  rectangle net NetR67_1: 5023,4703 5116,4763
  rectangle net NetR69_1: 5129,4801 5222,4841
  rectangle: 4002,5953 4840,6040
Bottom Layer:
  rectangle net 1.8VA: 2830,4552 2889,4643
  rectangle net 1.8VD: 3222,3958 3426,4018
  rectangle net DGND: 3050,3867 3446,3927
  rectangle net 1.8VA: 3778,4549 3837,4689
  rectangle net 1.8VA: 3206,4949 3471,5007
  rectangle net AGND: 2957,4262 3696,4906
  rectangle net V-: 2009,5937 2034,5986
  rectangle net DGND: 3061,3694 3120,3881
  rectangle: 3860,5953 4840,6041

## Silkscreen, mask and mechanical layers (free items; w line width, h text height)
Top Overlay:
  text "SDIO0" at 3361,4069.95 h60 r270
  text "SDIO2" at 3463,4069.95 h60 r270
  text "DGND" at 3055,4019.96 h60 r270
  text "DGND" at 3259,4019.96 h60 r270
  text "DGND" at 3565,4019.96 h60 r270
  text "P0" at 2851,3900 h60 r270
  text "P2" at 2953,3900 h60 r270
  text "CS" at 3157,3900 h60 r270
  text "DGND" at 2857,3499 h60 r270
  text "P1" at 2967,3499 h60 r270
  text "P3" at 3066,3499 h60 r270
  text "UP" at 3168,3499 h60 r270
  text "SCLK" at 3268,3499 h60 r270
  text "SDIO1" at 3370,3499 h60 r270
  text "SDIO3" at 3471,3499 h60 r270
  text "RESET" at 3576,3499 h60 r270
Top Paste:
  rectangle: 4001,5954 4277,6040
  rectangle: 4417,5953 4704,6040
Bottom Paste:
  rectangle: 2957,4262 3696,4906
  rectangle: 3860,5953 4840,6040

## Text inside footprints (layer, text, board x,y; h text height)
P2: Top Overlay "2" at 2790,3674 h50; Top Overlay "1" at 2790,3574 h50